# Altium PCB EMU_adc.PcbDoc
Units mil, origin at the board's own origin, x right, y up, seen from the top; angles counter-clockwise.
Board outline 985.8 x 985.52 mil, 2 copper layers (Top Layer, Bottom Layer); 10 components, 10 nets, 63 pads, 2 vias.
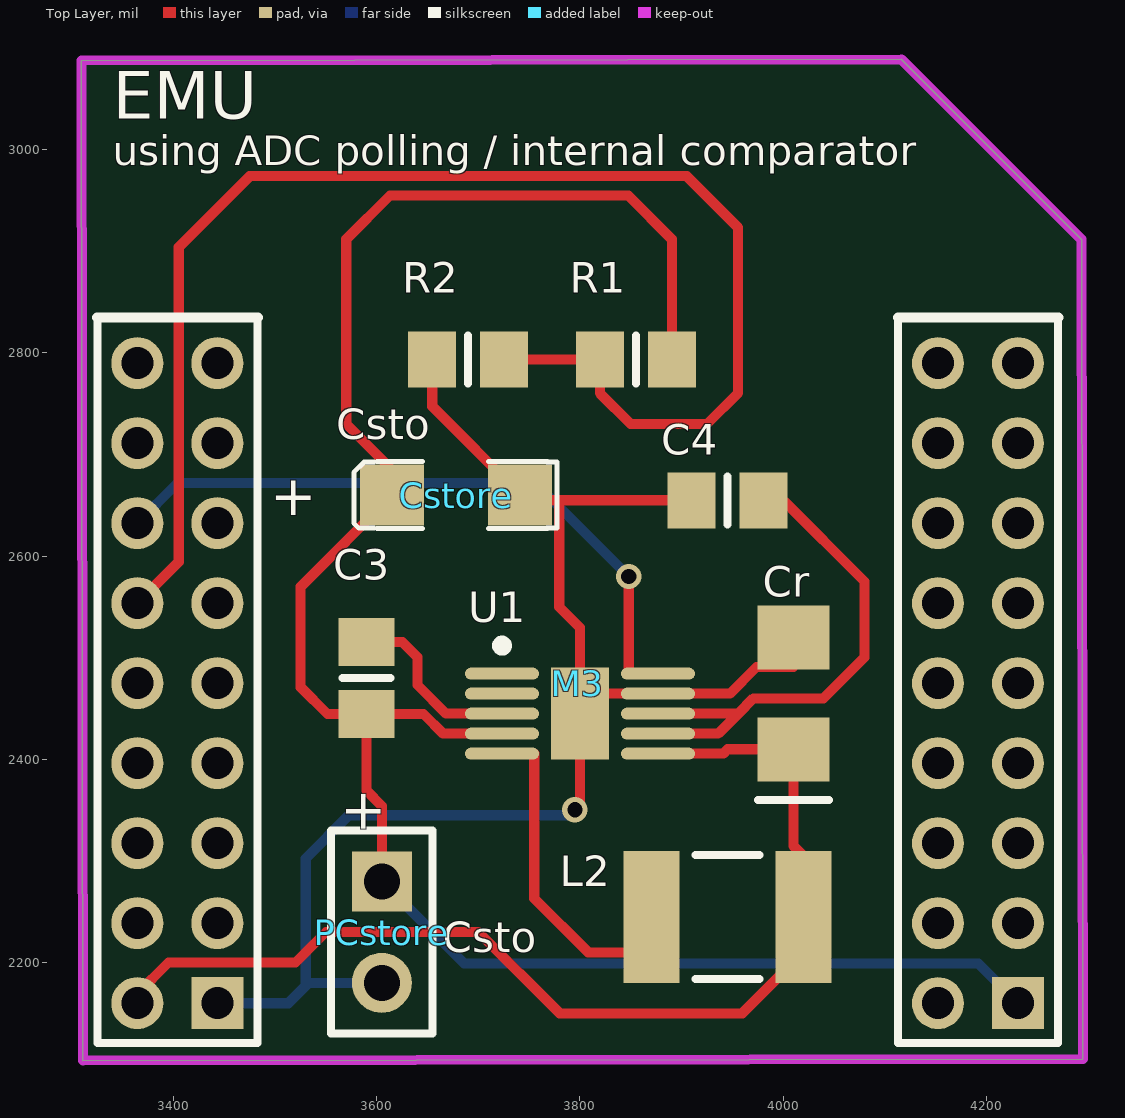
[diagram p0: Top Layer view]
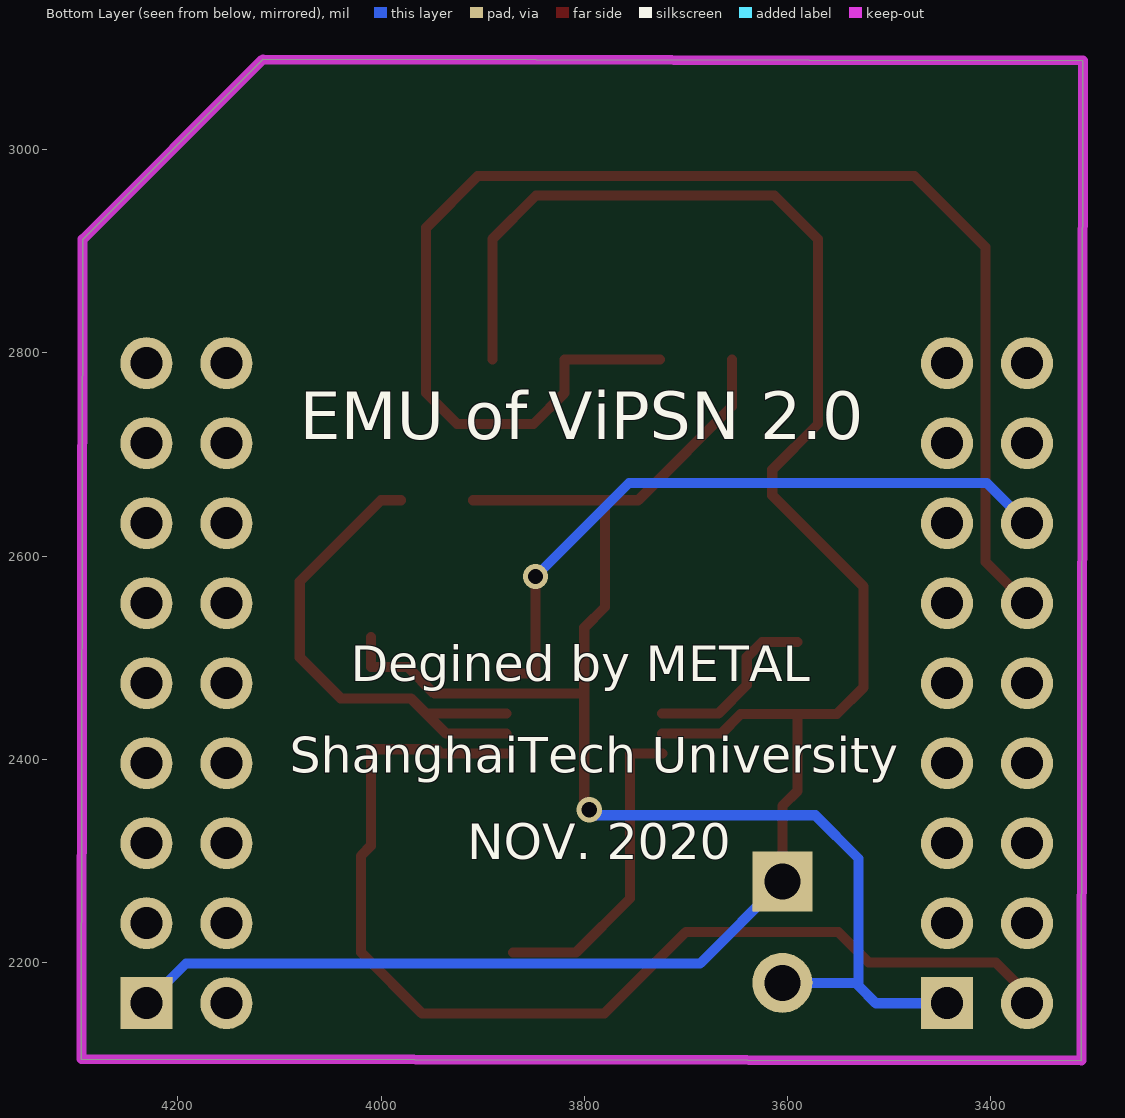
[diagram p1: Bottom Layer view, seen from below]

## Layer stack, top to bottom
Top Layer: signal copper 1.4
Dielectric: dielectric 12.6, FR-4, Dk 4.8
Bottom Layer: signal copper 1.4

## Board outline
3310.75,2103.45 3309.2,3087.7 4116.29,3088.97 4293.45,2911.81 4293.73,2912.09 4295,2105

## Design rules (kind name [scope] priority, off if disabled: settings)
Clearance [All] p1: gap=6
PolygonConnect [All] p1: connectstyle=Relief reliefconductorwidth=10 reliefentries=4 polygonreliefangle="90 Angle"
RoutingVias [All] p1: holewidth=15 width=25 viastyle="Through Hole" minholewidth=15 minwidth=25 maxholewidth=15 maxwidth=25
SilkscreenOverComponentPads SilkToSolderMaskClearance [IsPad] p1: minsilkscreentomaskgap=10
SolderMaskExpansion [All] p1: expansion=4
Width [All] p1: maxlimit=10 minlimit=10 preferedwidth=10
27 further rules are at their usual default settings.

## Components (designator, comment, footprint, x,y, rotation, side; value= is the part's Value field where it differs from the comment)
C3 "CAP" 6-0805_N 3590,2480 r270 top
C4 "CAP" 6-0805_N 3945,2655 r180 top
Cr "6.3V" 3216[1206] 4010,2465 r90 top
Cstore "Cap Pol1" 钽电容 3615,2665 r90 top
L2 "10uH" 1812 3945,2245 r0 top
M3 "MHDR2X18" module9x4 4230,2790 r180 top
PCstore "Header 2" HDR1X2 3605,2280 r270 top
R1 "Res1" 6-0805_N 3855,2793.62 r0 top
R2 "Res1" 6-0805_N 3690,2793.62 r0 top
U1 "LTC3588-1" "LTC 3588-1" 3800,2445 r0 top

## Footprints (in the part's own frame and the unit in brackets; to place one, negate y for a bottom-side part, rotate by r counter-clockwise, add the part's x,y. Pads: shape width x height; smd on the part's side, far side on the other; paste and mask are expansions set on the pad)
6-0805_N [mm] "Chip Resistor, Body 2.0x1.2mm, IPC Medium Density"
  rect 1.2x1.4 smd: 1(-0.9,0) 2(0.9,0)
  silkscreen extent 0,-0.6 0,0.6, body extent -1.07,-0.7 1.07,0.7, height 0.7
1812 [mm] "Chip Capacitor, Body 4.5x3.2mm, IPC High Density"
  rect 1.4x3.3 smd: 1(-1.9,0) 2(1.9,0)
  silkscreen extent -0.8,-1.55 0.8,1.55, body extent -2.4,-1.7 2.4,1.7, height 1.4
3216[1206] [mm] "Chip Resistor; Body 3.2 x 1.6 mm (LxW typ)"
  rect 1.6x1.8 smd: 1(-1.4,0) 2(1.4,0)
  silkscreen extent -2.67,-0.89 -2.67,0.89
HDR1X2 [mm] "Connector; Header; 2 Position"
  rect 1.5x1.5 hole 0.9: 1(0,0)
  round 1.5 hole 0.9: 2(2.54,0)
  silkscreen extent -1.27,-1.27 3.81,1.27
"LTC 3588-1" [mm] "10-Lead Plastic MSOP"
  oval 1.85x0.3 smd: 1(-1.95,1) 2(-1.95,0.5) 3(-1.95,0) 4(-1.95,-0.5) 5(-1.95,-1) 6(1.95,-1) 7(1.95,-0.5) 8(1.95,0) 9(1.95,0.5) 10(1.95,1)
  rect 1.45x2.3 smd: 11(0,0)
  silkscreen extent -2.07,1.58 -1.83,1.82, body extent -1.55,-1.55 1.55,1.55, height 1.1
module9x4 [mm]
  rect 1.3x1.3 hole 0.8: 1(-0.025,16.002) 36(19.99,16.002)
  round 1.3 hole 0.8: 2(21.99,16.002) 3(-0.025,14.002) 4(21.99,14.002) 5(-0.025,12.002) 6(21.99,12.002) 7(-0.025,10.002) 8(21.99,10.002) 9(-0.025,8.002) 10(21.99,8.002) 11(-0.025,6.002) 12(21.99,6.002) 13(-0.025,4.002) 14(21.99,4.002) 15(-0.025,2.002) 16(21.99,2.002) 17(-0.025,0.002) 18(21.99,0.002) 19(1.975,0.002) 20(19.99,0.002) 21(1.975,2.002) 22(19.99,2.002) 23(1.975,4.002) 24(19.99,4.002) 25(1.975,6.002) 26(19.99,6.002) 27(1.975,8.002) 28(19.99,8.002) 29(1.975,10.002) 30(19.99,10.002) 31(1.975,12.002) 32(19.99,12.002) 33(1.975,14.002) 34(19.99,14.002) 35(1.975,16.002)
  silkscreen extent -1.04,-1.14 22.99,17
钽电容 [mil]
  rect 60x62.99 smd: 1(-5,0) 2(-5,-125.98)
  silkscreen extent -38,-162 28,38

## Part data
C3 C4: "Capacitor"
Cr: library part "Cap Pol1", "Polarized Capacitor (Radial)"
Cstore: "Polarized Capacitor (Radial)"
L2: library part INDUCTOR
M3: "Header, 18-Pin, Dual row"
PCstore: "Header, 2-Pin"
R1 R2: "Resistor"
U1: "Nanopower energy harvesting power supply"

## Via types
v1: diameter 25, hole 15, Top Layer to Bottom Layer, 2 vias

## Nets (pads, with @x,y where several pads share a name; then routed paths per layer and width w, separated by ;. In a path a pad name is that pad's centre, name@x,y a point inside that pad or via, vN(x,y) a via of type N, cw(c..) or ccw(c..) an arc to the next point about the centre after c; other vN are vias at no path point)
EXTI: M3.12 R1.1 R2.2 | length 1419.2
  Top Layer w10: M3.12 3405,2594.45 3405,2904 3475,2974 3905,2974 3955.62,2923.38 3955.62,2760.62 3925,2730 3850,2730 3819.57,2760.43 R1.1 R2.2
EXTI2: M3.14 U1.10 | length 662.6
  Top Layer w10: v1(3848,2580) 3848,2484.37 U1.10
  Bottom Layer w10: M3.14 3403.81,2672 3756,2672 v1(3848,2580)
GND: C4.2 Cr.2 Cstore.2 M3.36 PCstore.2 R2.1 U1.9 U1.11 | length 1485.6
  Top Layer w10: R2.1 3654.57,2747.42 3741.48,2660.5 3746.98,2655 3779.57,2655 ; v1@3795,2350 3800,2355 U1.11 U1.11@3800,2464.69 ; C4.2 3779.57,2655 ; Cr.2 4010,2490.8 3973.68,2490.8 3947.57,2464.69 U1.9 U1.11@3800,2464.69 ; 3779.57,2655 3779.57,2550 3800,2529.57 U1.11@3800,2464.69
  Bottom Layer w10: M3.36 3513,2160 3530,2177 ; PCstore.2 3533,2180 3530,2177 ; v1@3795,2350 3790,2345 3572.52,2345 3530,2302.48 3530,2177
  other v1: 3795,2350.43
NetC3_1: C3.1 U1.3 | length 178.4
  Top Layer w10: C3.1 3625,2515.43 3640,2500.43 3640,2473.19 3668.19,2445 U1.3
NetC4_1: C4.1 U1.7 U1.8 | length 520.5
  Top Layer w10: U1.7 3935.94,2425.32 3955.62,2445 ; U1.8 3955.62,2445 ; C4.1 4000,2655 4080,2575 4080,2500.38 4039.62,2460 3970.62,2460 3955.62,2445
NetL2_1: L2.1 U1.5 | length 311.6
  Top Layer w10: U1.5 3755,2405.63 3755,2263 3808,2210 L2.1@3870.2,2210
P0.02: M3.10
P0.05: M3.16
VDD: Cr.1 L2.2 M3.2 U1.6 | length 1086.9
  Top Layer w10: M3.2 3364.25,2169.25 3395,2200 3520,2200 3550,2230 3700,2230 3780,2150 3959.8,2150 4019.8,2210 4019.8,2305 4010,2314.8 Cr.1 3945.25,2409.88 3941,2405.63 U1.6
VSTO: C3.2 Cstore.1 M3.1 PCstore.1 R1.2 U1.4 | length 2035
  Top Layer w10: PCstore.1 3605,2354 3590,2369 C3.2 ; U1.4 3665.25,2425.32 3646,2444.57 C3.2 ; R1.2 3890.43,2912 3847.43,2955 3613,2955 3570,2912 3570,2730 3615,2685 Cstore.1 3525,2570 3525,2471 3551.43,2444.57 C3.2
  Bottom Layer w10: PCstore.1 3686,2199 4192,2199 M3.1
pads on no net: M3.3 M3.4 M3.5 M3.6 M3.7 M3.8 M3.9 M3.11 M3.13 M3.15 M3.17 M3.18 M3.19 M3.20 M3.21 M3.22 M3.23 M3.24 M3.25 M3.26 M3.27 M3.28 M3.29 M3.30 M3.31 M3.32 M3.33 M3.34 M3.35 U1.1 U1.2

## Keep-outs
Keep-Out Layer:
  lines w10: 4293.45,2911.81 4116.29,3088.97 3309.2,3087.7 3310.75,2103.45 4295,2105 4293.73,2912.09

## Silkscreen, mask and mechanical layers (free items; w line width, h text height)
Top Overlay:
  text "EMU" at 3340,3015 h80
  text "using ADC polling / internal comparator" at 3340,2975 h50
  text "Csto" at 3560,2715 h30
  text "+" at 3495,2640 h40
  text "+" at 3570,2371.3 h40 r270
  text "Csto" at 3665,2210 h30
Bottom Overlay:
  text "EMU of ViPSN 2.0" at 4080,2700 h80
  text "Degined by METAL" at 4030,2465 h60
  text "ShanghaiTech University" at 4090,2375 h60
  text "NOV. 2020" at 3915,2290 h60